# Altium PCB Servos.PcbDoc
Units mm, origin at the board's own origin, x right, y up, seen from the top; angles counter-clockwise.
Board outline 78.25 x 74.75 mm, 2 copper layers (Top Layer, Bottom Layer); 39 components, 116 nets, 126 pads, 0 vias.
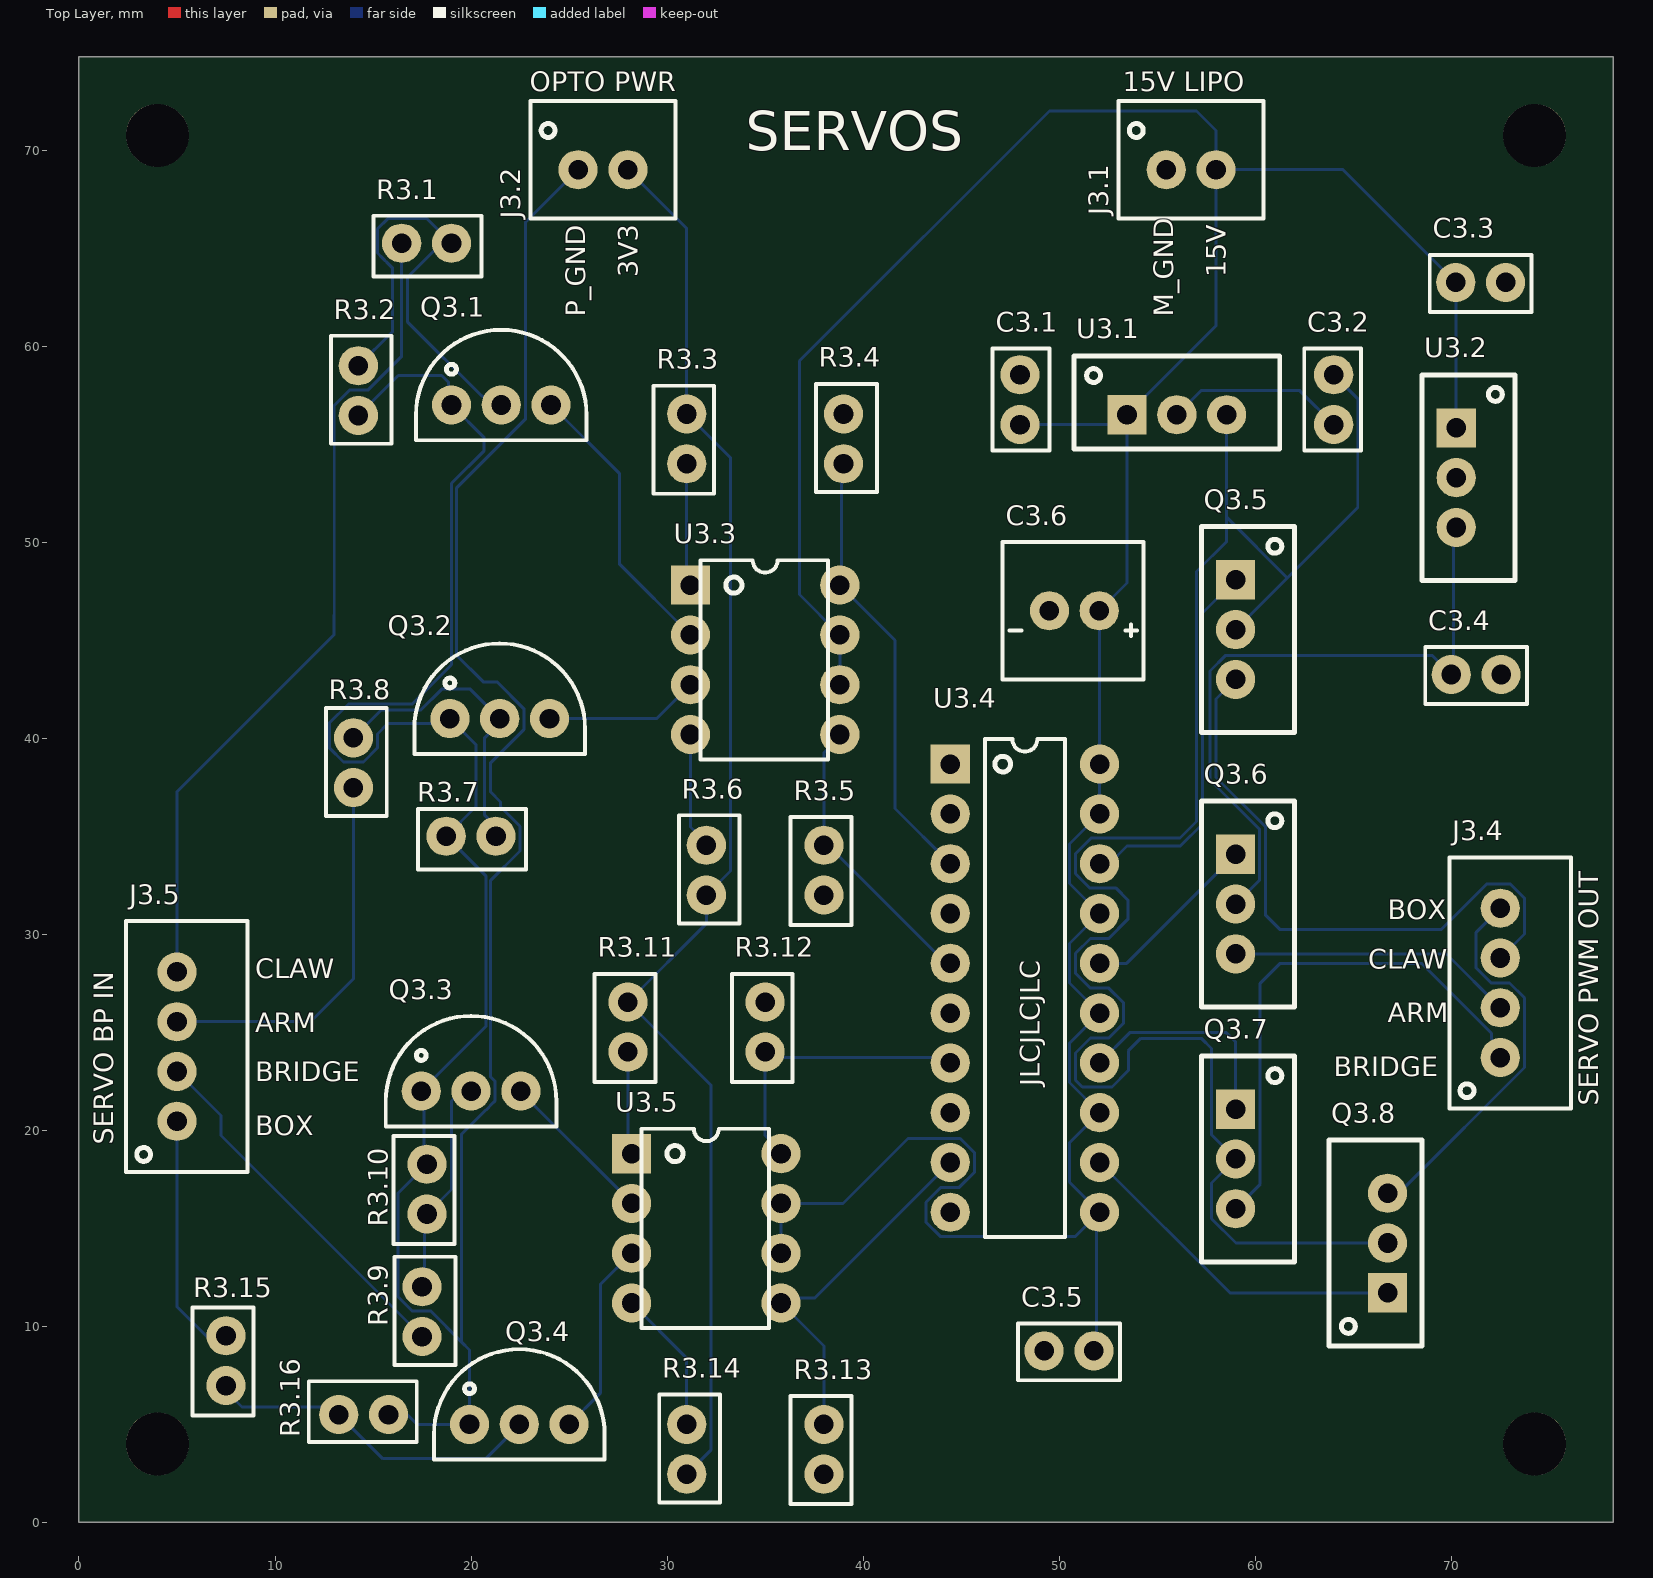
[diagram p0: Top Layer view]
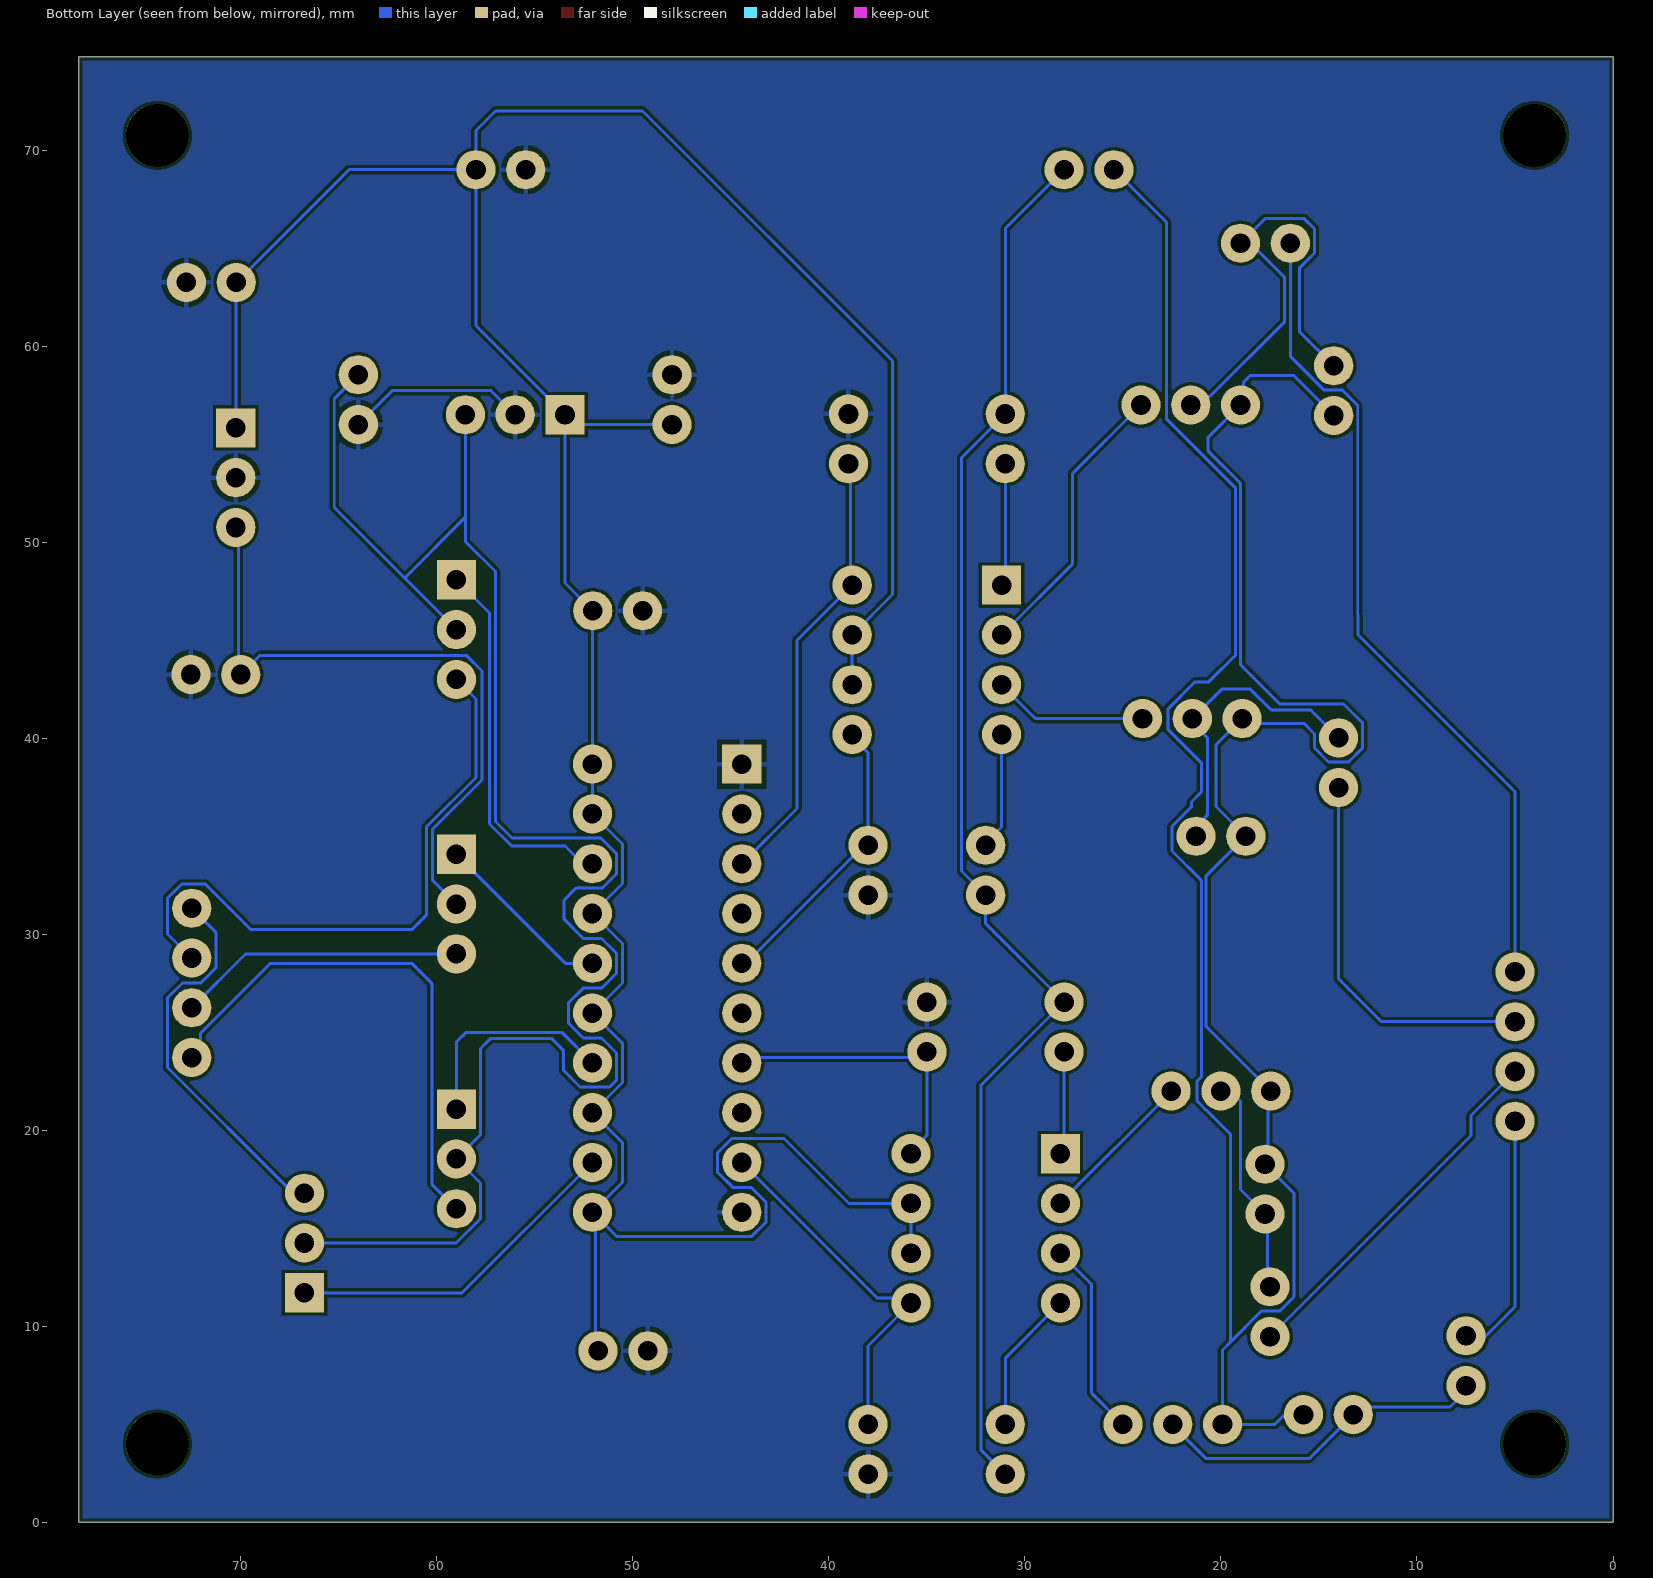
[diagram p1: Bottom Layer view, seen from below]
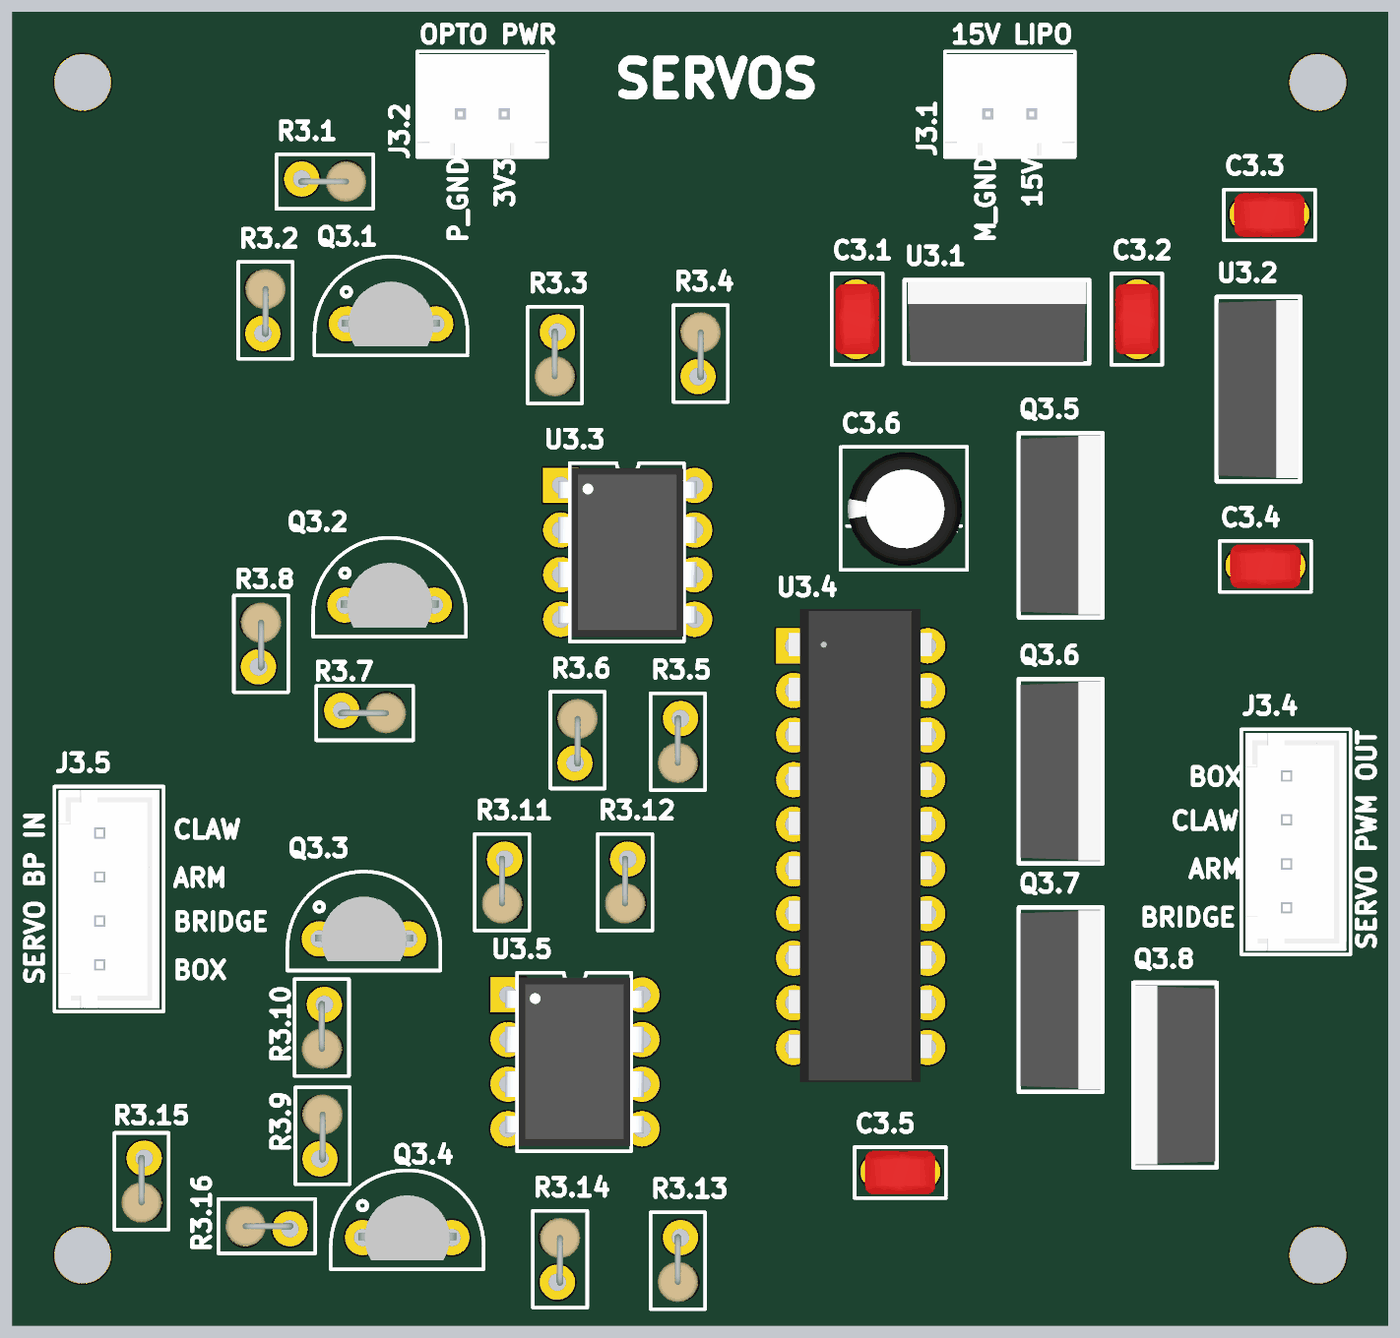
[diagram p2: 3D render of the assembled board from above, using the file's embedded part models]

## Layer stack, top to bottom
Top Solder: solder mask 0.0102, Solder Resist, Dk 3.5
Top Layer: signal copper 0.0356
Dielectric 1: dielectric 0.32, FR-4, Dk 4.8
Bottom Layer: signal copper 0.0356
Bottom Solder: solder mask 0.0102, Solder Resist, Dk 3.5

## Board outline
0,0 0,74.75 78.25,74.75 78.25,0

## Design rules (kind name [scope] priority, off if disabled: settings)
BoardOutlineClearance [All] p1: gap=0.2 ignorepadtopadclearanceinfootprint=FALSE
Clearance [All] p1: gap=0.152 ignorepadtopadclearanceinfootprint=FALSE
HoleSize [All] p1: absolutevalues=TRUE maxlimit=100 minlimit=0.4 maxpercent=80.000 minpercent=20.000
PolygonConnect [All] p1: connectstyle=Relief reliefconductorwidth=0.254 reliefentries=4 polygonreliefangle="90 Angle" airgapwidth=0.254
RoutingVias [All] p1: holewidth=0.4 width=0.8 viastyle="Through Hole" minholewidth=0.4 minwidth=0.6 maxholewidth=100 maxwidth=100
SilkToSilkClearance [All] p1: silktosilkclearance=0
SilkToSolderMaskClearance [IsPad] p1: minsilkscreentomaskgap=0 clearancetoexposedcopper=TRUE
SolderMaskExpansion [All] p1: expansion=0.102 istentingtop=FALSE
Width [All] p1: maxlimit=100 minlimit=0.152 preferedwidth=0.152
27 further rules are at their usual default settings.

## Components (designator, comment, footprint, x,y, rotation, side; value= is the part's Value field where it differs from the comment)
C3.1 "470n" "Non Polarized Cap" 48,57.27 r270 top
C3.2 "100n" "Non Polarized Cap" 64,57.27 r90 top
C3.3 "470n" "Non Polarized Cap" 71.5,63.25 r180 top
C3.4 "100n" "Non Polarized Cap" 71.27,43.25 r180 top
C3.5 "100p" "Non Polarized Cap" 50.5,8.75 r180 top
C3.6 "100u" "Polarized Cap" 50.77,46.5 r180 top
J3.1 "15V Lipo" "2pos JST" 56.73,69 r0 top
J3.2 "Optocoupler Power" "2pos JST" 26.73,69 r0 top
J3.4 "PWM to Servos" "4Pos JST" 72.5,27.52 r90 top
J3.5 "4pos" "4Pos JST" 5,24.27 r90 top
Q3.1 "VN2222LL" VN2222LL 21.54,57 r0 top
Q3.2 "VN2222LL" VN2222LL 21.46,41 r0 top
Q3.3 "VN2222LL" VN2222LL 20,22 r0 top
Q3.4 "VN2222LL" VN2222LL 22.46,5 r0 top
Q3.5 "IRFZ44" TO220 59,45.54 r270 top
Q3.6 "IRFZ44" TO220 59,31.54 r270 top
Q3.7 "IRFZ44" TO220 59,18.54 r270 top
Q3.8 "IRFZ44" TO220 66.75,14.25 r90 top
R3.1 "1k" Res_Generic 17.73,65.25 r0 top
R3.2 "10k" Res_Generic 14.25,57.73 r90 top
R3.3 "330" Res_Generic 31,55.27 r270 top
R3.4 "1k" Res_Generic 39,55.27 r90 top
R3.5 "1k" Res_Generic 38,33.27 r270 top
R3.6 "330" Res_Generic 32,33.27 r90 top
R3.7 "10k" Res_Generic 20,35 r0 top
R3.8 "1k" Res_Generic 14,38.75 r90 top
R3.9 "1k" Res_Generic 17.5,10.75 r90 top
R3.10 "10k" Res_Generic 17.75,17 r270 top
R3.11 "330" Res_Generic 28,25.27 r270 top
R3.12 "1k" Res_Generic 35,25.27 r270 top
R3.13 "1k" Res_Generic 38,3.73 r270 top
R3.14 "330" Res_Generic 31,3.73 r90 top
R3.15 "1k" Res_Generic 7.5,8.25 r270 top
R3.16 "10k" Res_Generic 14.52,5.5 r180 top
U3.1 "5V SNS" TO220 56,56.5 r0 top
U3.2 "5V SNS" TO220 70.25,53.29 r270 top
U3.3 "MCT6" DIP8 35,44 r0 top
U3.4 "LT1161IN" DIP20 48.25,27.25 r0 top
U3.5 "MCT6" DIP8 32,15 r0 top

## Footprints (in the part's own frame and the unit in brackets; to place one, negate y for a bottom-side part, rotate by r counter-clockwise, add the part's x,y. Pads: shape width x height; smd on the part's side, far side on the other; paste and mask are expansions set on the pad)
"2pos JST" [mm]
  round 2 hole 1: 1(-1.27,0) 2(1.27,0)
  silkscreen extent -3.7,-2.5 3.7,3.5, body extent -3.7,-2.4 3.7,3.35, height 7.01
"4Pos JST" [mm]
  round 2 hole 1: 1(-3.81,0) 2(-1.27,0) 3(1.27,0) 4(3.81,0)
  silkscreen extent -6.4,-3.6 6.4,2.6, body extent -6.2,-3.38 6.2,2.37, height 7.01
DIP8 [mm]
  rect 2x2 hole 1: 1(-3.81,3.81)
  round 2 hole 1: 2(-3.81,1.27) 3(-3.81,-1.27) 4(-3.81,-3.81) 5(3.81,-3.81) 6(3.81,-1.27) 7(3.81,1.27) 8(3.81,3.81)
  silkscreen extent -3.3,-5.08 3.2,5.08, body extent -3.96,-4.79 3.91,4.79, height 5.33
DIP20 [mm]
  rect 2x2 hole 1: 1(-3.81,11.43)
  round 2 hole 1: 2(-3.81,8.89) 3(-3.81,6.35) 4(-3.81,3.81) 5(-3.81,1.27) 6(-3.81,-1.27) 7(-3.81,-3.81) 8(-3.81,-6.35) 9(-3.81,-8.89) 10(-3.81,-11.43) 11(3.81,-11.43) 12(3.81,-8.89) 13(3.81,-6.35) 14(3.81,-3.81) 15(3.81,-1.27) 16(3.81,1.27) 17(3.81,3.81) 18(3.81,6.35) 19(3.81,8.89) 20(3.81,11.43)
  silkscreen extent -2.04,-12.7 2.04,12.7, body extent -4.09,-13.39 4.04,13.53, height 3.81
"Non Polarized Cap" [mm] "Cap Generic THT"
  round 2 hole 1: 1(-1.27,0) 2(1.27,0)
  silkscreen extent -2.6,-1.4 2.6,1.5, body extent -2,-1.2 2,1.3, height 6
"Polarized Cap" [mm]
  round 2 hole 1: 1(-1.27,0) 2(1.27,0)
  silkscreen extent -3.53,-3.5 3.66,3.5, body extent -3.25,-3.22 3.25,3.28, height 11.37
Res_Generic [mm] "Cap Generic THT Footprint"
  round 2 hole 1: 1(-1.27,0) 2(1.27,0)
  silkscreen extent -2.71,-1.7 2.8,1.4, body extent -1.47,-1.3 2.4,1, height 8.18
TO220 [mm]
  rect 2x2 hole 1: 1(-2.54,0)
  round 2 hole 1: 2(0,0) 3(2.54,0)
  silkscreen extent -5.25,-1.75 5.25,3, body extent -5.08,-1.66 5.08,2.91, height 19.6
VN2222LL [mm]
  round 2 hole 1: 1(-2.54,0) 2(0,0) 3(2.54,0)
  silkscreen extent -4.35,-1.8 4.35,3.83, body extent -2.78,-1.28 2.78,2.4, height 7.82

## Part data
C3.1 C3.2 C3.3 C3.4 C3.5: library part Cap_Generic
C3.6: library part "Polarized Cap"
J3.1 J3.2: library part "2pos Conn", "2pos Conn JST"
J3.4 J3.5: library part "4pos Conn", "4pos Conn"
Q3.1 Q3.2 Q3.3 Q3.4: library part "VN2222LL NMOS", "VN2222LL N-Channel 60 V 150mA 400mW Through Hole TO-92 (TO-226)", Supplier Part Number 1=689-VN2222LL-G, Supplier 1=Mouser
Q3.5 Q3.6 Q3.7 Q3.8: library part "IRFZ44 NMOS", "IRFZ44EPBF N-Channel 60 V 48A 110W Through Hole TO-220AB", Supplier Part Number 1=IRFZ44ZLPBF-ND, Supplier 1=Digi-Key
R3.1 R3.2 R3.3 R3.4 R3.5 R3.6 R3.7 R3.8 R3.9 R3.10 R3.11 R3.12 R3.13 R3.14 R3.15 R3.16: library part Res_Generic
U3.1 U3.2: library part "UA7805 5V Reg", "UA7805 IC REG LINEAR 5V 1.5A TO220-3", Supplier Part Number 1=296-39515-5-ND, Supplier 1=Digi-Key
U3.3 U3.5: library part "MCT6 Optocoupler", "Optoisolator 5.3KV 2CH TRANS 8-DIP", Supplier Part Number 1=512-MCT6, Supplier 1=Mouser
U3.4: library part "LT1161IN Gate Driver", "LT1161IN High-Side Gate Driver IC Non-Inverting 20-PDIP", Supplier Part Number 1=LT1161IN#PBF-ND, Supplier 1=Digi-Key

## Free pads (board coordinates)
  round 3.2 hole 3.2: ""(4,4) ""(4,70.75) ""(74.25,4) ""(74.25,70.75)

## Nets (pads, with @x,y where several pads share a name; then routed paths per layer and width w, separated by ;. In a path a pad name is that pad's centre, name@x,y a point inside that pad or via, vN(x,y) a via of type N, cw(c..) or ccw(c..) an arc to the next point about the centre after c; other vN are vias at no path point)
3.3V_P: J3.2.2 R3.3.1 R3.6.1 R3.11.1 R3.14.1 | length 73.1
  Bottom Layer w0.152: J3.2.2 31,66 R3.3.1 33.229,54.311 33.229,33.229 R3.6.1 32,30.54 R3.11.1 32.25,22.29 32.25,3.71 R3.14.1
5V_ARM: C3.4.2 Q3.6.2 U3.2.3 | length 34.1
  Bottom Layer w0.152: Q3.6.2 60.229,32.769 60.229,35.34 57.695,37.874 57.695,43.433 58.491,44.229 69.021,44.229 C3.4.2 70.125,43.375 70.125,50.625 U3.2.3
5V_P: 
5V_SERVO: C3.2.2 Q3.5.2 Q3.7.2 Q3.8.2 U3.1.3 | length 95
  Bottom Layer w0.152: U3.1.3 58.54,51.269 ; Q3.5.2 61.634,48.174 ; C3.2.2 65.229,57.311 65.229,51.769 61.634,48.174 ; Q3.8.2 59.012,14.25 57.771,15.491 57.771,17.311 Q3.7.2 57.771,19.769 57.771,24.174 57.25,24.695 54.165,24.695 53.526,24.056 53.526,23.05 52.687,22.211 51.18,22.211 50.831,22.56 50.831,23.949 51.593,24.71 52.528,24.71 53.289,25.471 53.289,26.489 52.528,27.25 51.592,27.25 50.831,28.011 50.831,29.029 51.593,29.79 52.528,29.79 53.5,30.762 53.5,31.75 52.879,32.371 51.551,32.371 50.831,33.091 50.831,34.109 51.634,34.911 56.161,34.911 57,35.75 57,48.5 58.54,50.04 58.54,51.269 ; 58.54,51.269 61.634,48.174
8V: 
15V: C3.1.2 C3.3.2 C3.5.1 C3.6.1 J3.1.2 U3.1.1 U3.2.1 U3.3.6 U3.3.7 U3.4.11 U3.4.13 U3.4.15 U3.4.17 U3.4.19 U3.4.20 U3.5.6 U3.5.7 | length 170.6
  Bottom Layer w0.152: U3.5.6 U3.5.7 38.97,16.27 42.289,19.589 44.949,19.589 45.669,18.869 45.669,17.851 44.908,17.09 43.973,17.09 43.211,16.329 43.211,15.311 43.931,14.591 50.831,14.591 U3.4.11@51.915,15.675 ; U3.3.6 U3.3.7 36.75,47.33 36.75,59.25 49.5,72 57,72 58,71 J3.1.2 ; C3.1.2 52.96,56 U3.1.1 ; C3.5.1 51.915,8.895 U3.4.11@51.915,15.675 ; U3.2.1 70.23,55.85 C3.3.2 64.48,69 J3.1.2 ; U3.4.11@51.915,15.675 U3.4.11 50.527,17.353 50.527,19.367 U3.4.13 50.527,22.433 50.527,24.447 U3.4.15 50.527,27.513 50.527,29.527 U3.4.17 50.527,32.593 50.527,34.607 U3.4.19 U3.4.20 52.05,38.69 52.05,46.49 C3.6.1 53.46,47.92 U3.1.1 ; U3.1.1 58,61.04 J3.1.2
ARM_SERV_BP_OUT: J3.5.3 R3.8.1 | length 19.7
  Bottom Layer w0.152: J3.5.3 11.81,25.54 14,27.73 R3.8.1
ARM_SERV_PWM: J3.4.2 Q3.6.3 | length 14.7
  Bottom Layer w0.152: Q3.6.3@58.896,29 69.75,29 J3.4.2
BOX_SERV_BP_OUT: J3.5.1 R3.15.1 | length 12.8
  Bottom Layer w0.152: J3.5.1 5,11 6.9,9.1 R3.15.1@7.6,9.1
BOX_SERV_PWM: J3.4.4 Q3.8.3 | length 19.8
  Bottom Layer w0.152: Q3.8.3 67.104,17.144 67.671,17.144 73.729,23.201 73.729,26.759 72.968,27.52 72.033,27.52 71.271,28.281 71.271,30.101 J3.4.4
BRIDGE_SERV_BP_OUT: J3.5.2 R3.9.1 | length 19.2
  Bottom Layer w0.152: J3.5.2 5.155,22.845 7.25,20.75 7.25,19.73 R3.9.1 R3.9.1@17.98,9.48
BRIDGE_SERV_PWM: J3.4.1 Q3.7.3 | length 27.1
  Bottom Layer w0.152: Q3.7.3 60.25,17.25 60.25,27.5 61.25,28.5 68.5,28.5 72.054,24.946 72.054,24.656 72.5,24.21 J3.4.1
CLAW_SERV_BP_OUT: J3.5.4 R3.1.1 | length 42.5
  Bottom Layer w0.152: J3.5.4 5,37.27 13,45.27 13,46.25 13.021,46.271 13.021,56.969 13.824,57.771 14.759,57.771 16.445,59.458 16.445,63.626 16.46,63.641 R3.1.1
CLAW_SERV_PWM: J3.4.3 Q3.5.3 | length 31.8
  Bottom Layer w0.152: Q3.5.3 58,42 58,38 60.533,35.467 60.533,30.967 61.25,30.25 69.5,30.25 71.809,32.559 73.009,32.559 73.729,31.839 73.729,30.019 J3.4.3
DCLK: 
DIO: 
ECHO_F_M: 
ECHO_S_L: 
ECHO_S_R: 
ECHO_SPARE: 
ENCODER_L_I: 
ENCODER_L_Q: 
ENCODER_R_I: 
ENCODER_R_Q: 
IR_LEFT_TRANS: 
IR_RIGHT_TRANS: 
IR_SNS_LEFT: 
IR_SNS_RIGHT: 
LEFT+: 
LEFT-: 
LEFT_FWD: 
LEFT_FWD_BP_OUT: 
LEFT_REV: 
LEFT_REV_BP_OUT: 
M_GND: C3.1.1 C3.2.1 C3.3.1 C3.4.1 C3.5.2 C3.6.2 J3.1.1 R3.4.2 R3.5.2 R3.12.1 R3.13.2 U3.1.2 U3.2.2 U3.4.1 U3.4.10 | length 9.2
  Bottom Layer w0.152: U3.1.2 57.229,57.729 62.271,57.729 C3.2.1
MAGNET_SNS: 
NetC1.8_2: 
NetC5.1_1: 
NetC5.1_2: 
NetC5.2_1: 
NetC5.2_2: 
NetQ2.1_2: 
NetQ2.1_3: 
NetQ2.2_2: 
NetQ2.2_3: 
NetQ2.3_2: 
NetQ2.3_3: 
NetQ2.4_2: 
NetQ2.4_3: 
NetQ3.1_2: Q3.1.2 R3.1.2 R3.2.2 | length 24.3
  Bottom Layer w0.152: R3.2.2 16,60.75 16,63.983 15.955,64.028 15.699,64.284 ; 15.698,64.285 15.693,64.29 cw(c16.46,65.25) 15.5,64.483 15.494,64.489 15.231,64.752 15.231,65.981 15.75,66.5 17.75,66.5 R3.1.2 18.5,65.25 18.034,64.784 16.75,63.5 16.75,61.25 20.554,57.446 20.594,57.446 21.04,57 Q3.1.2
NetQ3.1_3: Q3.1.3 U3.3.2 | length 14.7
  Bottom Layer w0.152: Q3.1.3 27.564,53.516 27.564,48.896 U3.3.2
NetQ3.2_2: Q3.2.2 R3.7.2 R3.8.2 | length 15.7
  Bottom Layer w0.152: R3.8.2 15.417,41.437 17.437,41.437 18.5,42.5 19.96,42.5 Q3.2.2 21.46,40.792 20.695,40.027 20.695,36.075 21.27,35.5 R3.7.2
NetQ3.2_3: Q3.2.3 U3.3.3 | length 7.9
  Bottom Layer w0.152: Q3.2.3 29.46,41 U3.3.3
NetQ3.3_2: Q3.3.2 R3.9.2 R3.10.2 | length 11.3
  Bottom Layer w0.152: R3.9.2 17.625,12.145 17.625,15.605 R3.10.2 19,16.98 19,21.5 19.5,22 Q3.3.2
NetQ3.3_3: Q3.3.3 U3.5.2 | length 8.1
  Bottom Layer w0.152: Q3.3.3 22.54,21.96 28.19,16.31 U3.5.2
NetQ3.4_2: Q3.4.2 R3.15.2 R3.16.2 | length 16.6
  Bottom Layer w0.152: R3.15.2@7.6,6.6 8.315,5.885 12.865,5.885 R3.16.2 ; R3.16.2@13.561,5.189 15.5,3.25 20.75,3.25 22.46,4.96 Q3.4.2
NetQ3.4_3: Q3.4.3 U3.5.3 | length 10.1
  Bottom Layer w0.152: Q3.4.3 26.595,6.595 26.595,12.135 U3.5.3
NetQ3.5_1: Q3.5.1 U3.4.18 | length 19.2
  Bottom Layer w0.152: U3.4.18 52.56,33.6 53.46,34.5 56.181,34.5 57.305,35.624 57.305,46.385 Q3.5.1
NetQ3.6_1: Q3.6.1 U3.4.16 | length 9.2
  Bottom Layer w0.152: U3.4.16 53.44,28.52 Q3.6.1
NetQ3.7_1: Q3.7.1 U3.4.14 | length 11.2
  Bottom Layer w0.152: U3.4.14 53.62,25 58.5,25 59,24.5 Q3.7.1
NetQ3.8_1: Q3.8.1 U3.4.12 | length 17.4
  Bottom Layer w0.152: U3.4.12 58.71,11.71 Q3.8.1
NetR2.3_2: 
NetR2.6_2: 
NetR2.7_1: 
NetR2.8_1: 
NetR2.13_2: 
NetR2.14_2: 
NetR2.15_2: 
NetR2.16_2: 
NetR3.3_2: R3.3.2 U3.3.1 | length 6.3
  Bottom Layer w0.152: R3.3.2 31,48 U3.3.1
NetR3.4_1: R3.4.1 U3.3.8 U3.4.3 | length 22.8
  Bottom Layer w0.152: R3.4.1 38.905,53.905 38.905,47.905 U3.3.8 41.625,44.995 41.625,36.415 U3.4.3
NetR3.5_1: R3.5.1 U3.3.5 U3.4.5 | length 14.9
  Bottom Layer w0.152: U3.3.5 38.81,40.072 38,39.262 R3.5.1 38.21,34.54 44.23,28.52 U3.4.5
NetR3.6_2: R3.6.2 U3.3.4 | length 6
  Bottom Layer w0.152: U3.3.4 31.19,35.467 32,34.657 R3.6.2
NetR3.11_2: R3.11.2 U3.5.1 | length 5.3
  Bottom Layer w0.152: R3.11.2 28,19 U3.5.1
NetR3.12_2: R3.12.2 U3.4.7 U3.5.8 | length 15.2
  Bottom Layer w0.152: U3.5.8 35.81,18.927 35,19.737 R3.12.2 35.28,23.72 44.16,23.72 U3.4.7
NetR3.13_1: R3.13.1 U3.4.9 U3.5.5 | length 18.7
  Bottom Layer w0.152: R3.13.1 38,9 U3.5.5 36.079,11.459 37.539,11.459 U3.4.9
NetR3.14_2: R3.14.2 U3.5.4 | length 7.4
  Bottom Layer w0.152: U3.5.4 31,8.38 R3.14.2
NetR4.11_2: 
NetR4.13_2: 
NetR4.15_2: 
NetR4.17_2: 
NetR4.19_2: 
NetR5.2_1: 
NetR5.4_2: 
NetR5.7_1: 
NetR5.9_2: 
P_GND: J3.2.1 Q3.1.1 Q3.2.1 Q3.3.1 Q3.4.1 R3.2.1 R3.7.1 R3.10.1 R3.16.1 | length 150.9
  Bottom Layer w0.152: R3.2.1 16.29,58.5 18.5,58.5 18.861,58.139 18.861,57.139 Q3.1.1 20.67,55.33 20.67,54.67 19,53 19,43.75 17,41.75 13.75,41.75 12.771,40.771 12.771,39.511 13.491,38.791 14.509,38.791 15.229,39.511 15.229,40.158 ; 15.222,40.151 15.222,40.158 15.222,40.222 15.75,40.75 18.67,40.75 Q3.2.1 20.25,39.67 20.25,36.52 R3.7.1 20.75,32.98 20.75,25.29 Q3.3.1 17.605,21.855 17.605,18.415 R3.10.1 16.271,16.791 16.271,11.511 16.991,10.791 17.926,10.791 19.5,9.217 ; R3.16.1@16.75,5.5 17.25,5 Q3.4.1 19.92,5.357 19.92,5.42 19.92,8.798 19.5,9.217 ; Q3.4.1@20.523,4.801 20.523,4.397 Q3.4.1@20.536,4.384 ; J3.2.1 22.769,66.309 22.769,56.269 19.25,52.75 19.25,44.25 20.621,42.879 21.318,42.879 22.689,41.509 22.689,40.439 21,38.75 21,37.256 21.506,36.75 21.506,36.501 22.499,35.509 22.499,34.249 21,32.75 21,22.714 21.229,22.485 21.229,21.515 21,21.286 cw(c20,22) 20.714,21 19.5,19.786 19.5,9.217
REF_F_L_COL: 
REF_F_L_LED: 
REF_F_L_SNS: 
REF_F_R_COL: 
REF_F_R_LED: 
REF_F_R_SNS: 
REF_R_COL: 
REF_R_LED: 
REF_R_SNS: 
REF_S_L_COL: 
REF_S_L_LED: 
REF_S_L_SNS: 
REF_S_R_COL: 
REF_S_R_LED: 
REF_S_R_SNS: 
RIGHT+: 
RIGHT-: 
RIGHT_FWD: 
RIGHT_FWD_BP_OUT: 
RIGHT_REV: 
RIGHT_REV_BP_OUT: 
SPARE_1: 
SW_CLAW+: 
SW_CLAW_SNS: 
SW_FRONT+: 
SW_FRONT_SNS: 
SW_REAR+: 
SW_REAR_SNS: 
TRIG_COM: 
pads on no net: U3.4.2 U3.4.4 U3.4.6 U3.4.8

## Polygon pours and split planes (outlines as drawn)
M_GND on Bottom Layer "GND " (solid, remove dead copper, pour order 0): 0,74.75 78.25,74.75 78.25,0 0,0

## Silkscreen, mask and mechanical layers (free items; w line width, h text height)
Top Overlay:
  text "OPTO PWR" at 23.004,73.004 h1
  text "15V LIPO" at 53.254,73.004 h1
  text "SERVOS" at 34,70 h2
  text "3V3" at 28.496,63.504 h1 r90
  text "15V" at 58.496,63.504 h1 r90
  text "P_GND" at 25.829,61.504 h1 r90
  text "M_GND" at 55.829,61.504 h1 r90
  text "BOX" at 66.754,30.754 h1
  text "CLAW" at 65.754,28.254 h1
  text "CLAW" at 9.004,27.754 h1
  text "ARM" at 66.754,25.504 h1
  text "ARM" at 9.004,25.004 h1
  text "BRIDGE" at 64.004,22.754 h1
  text "BRIDGE" at 9.004,22.504 h1
  text "JLCJLCJLC" at 48.996,22.254 h1 r90
  text "SERVO PWM OUT" at 77.496,21.254 h1 r90
  text "BOX" at 9.004,19.754 h1
  text "SERVO BP IN" at 1.746,19.254 h1 r90
Mechanical 1:
  the board outline again, w0.2